# Altium PCB PCB2.PcbDoc
Units mil, origin at the board's own origin, x right, y up, seen from the top; angles counter-clockwise.
Board outline 3504.19 x 3504.19 mil, 2 copper layers (Top Layer, Bottom Layer); 6 components, 17 nets, 47 pads, 3 vias.
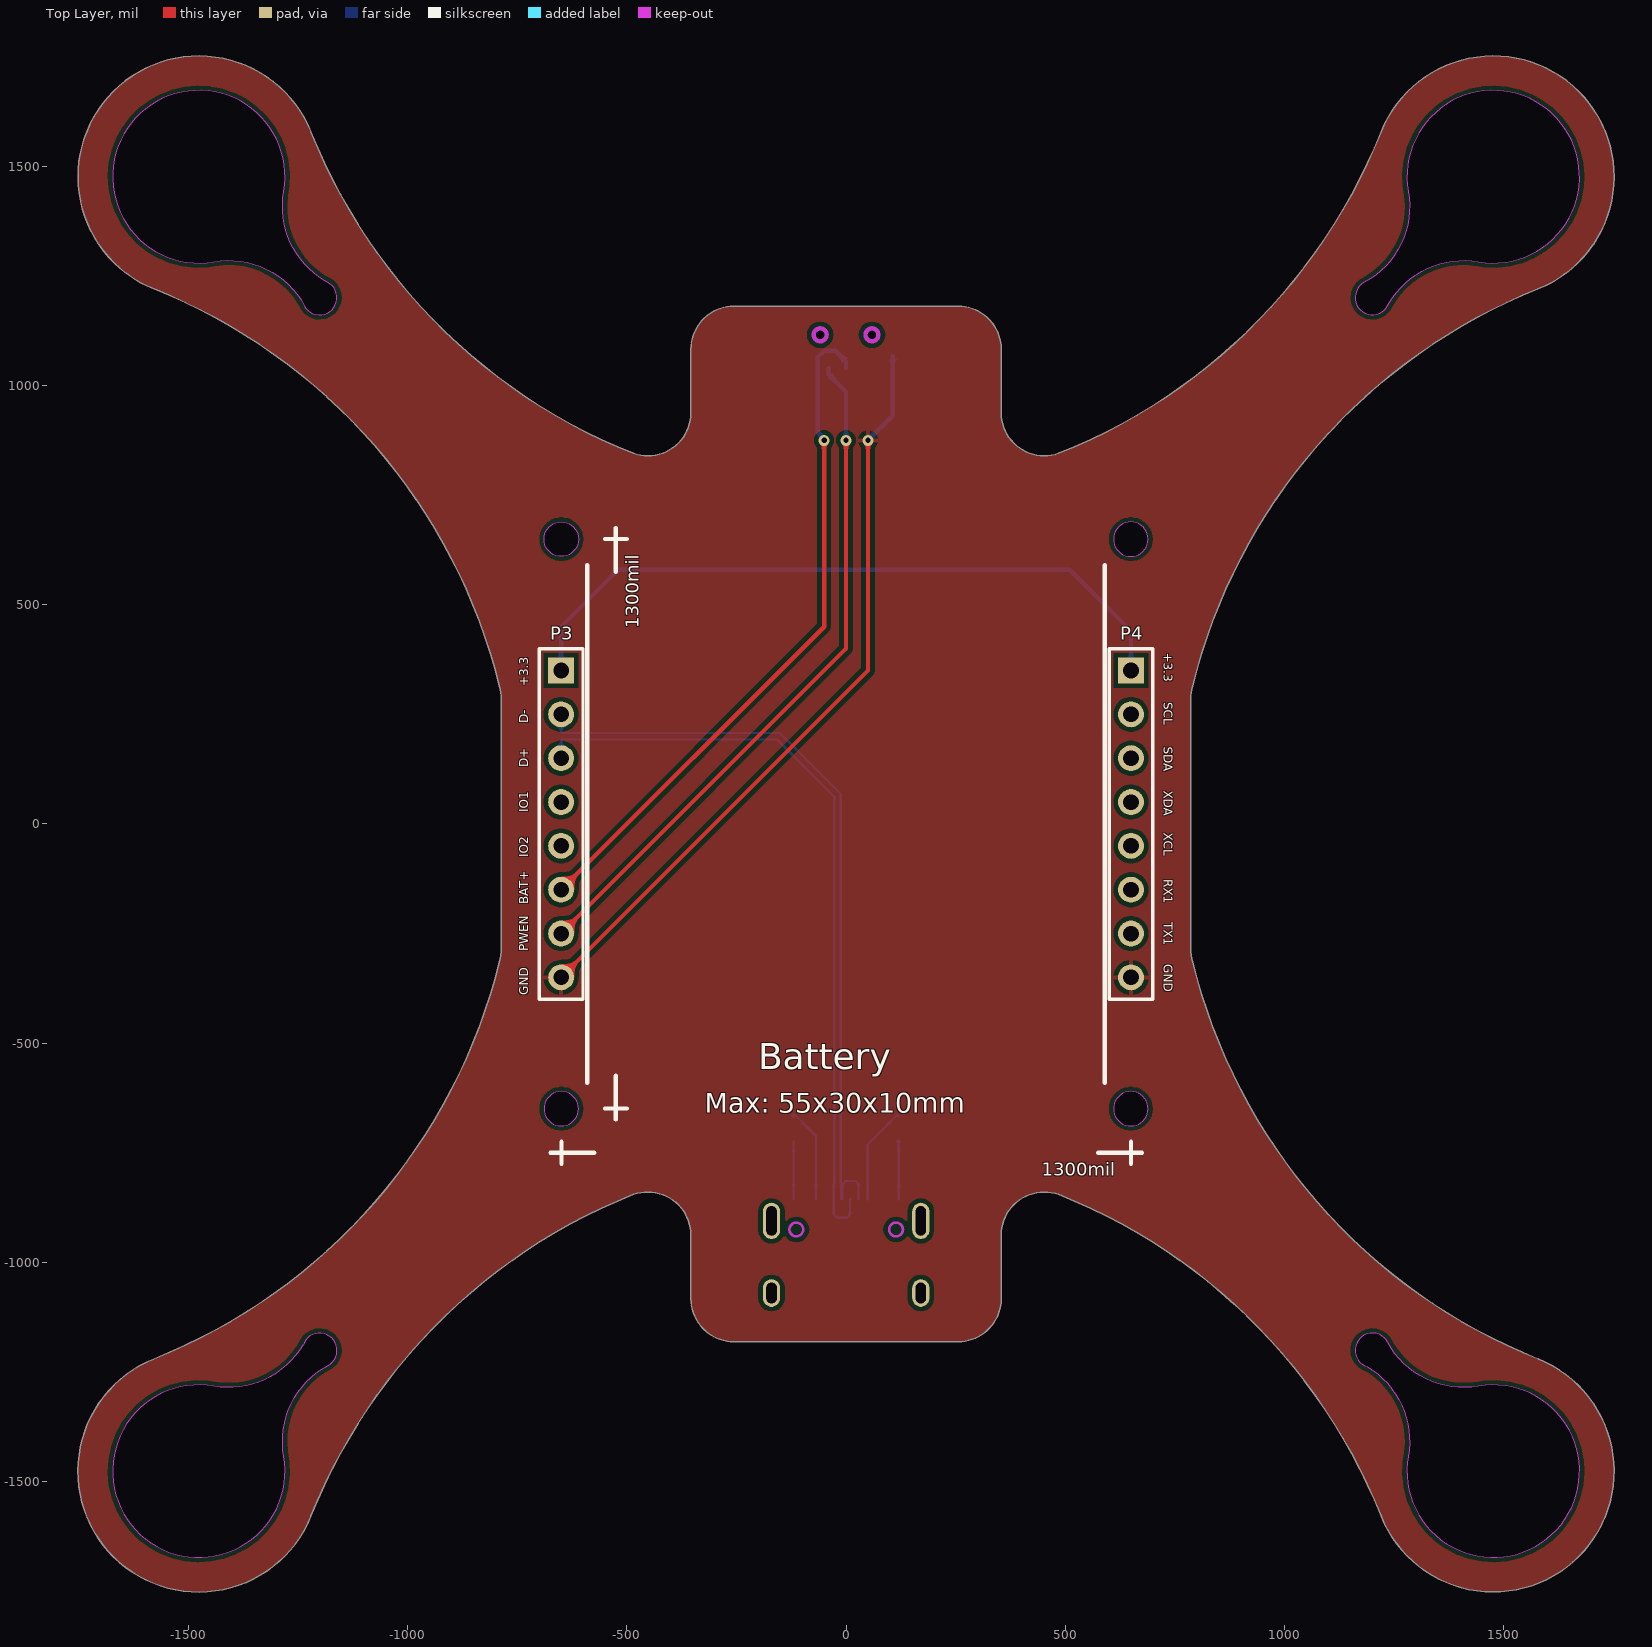
[diagram p0: Top Layer view]
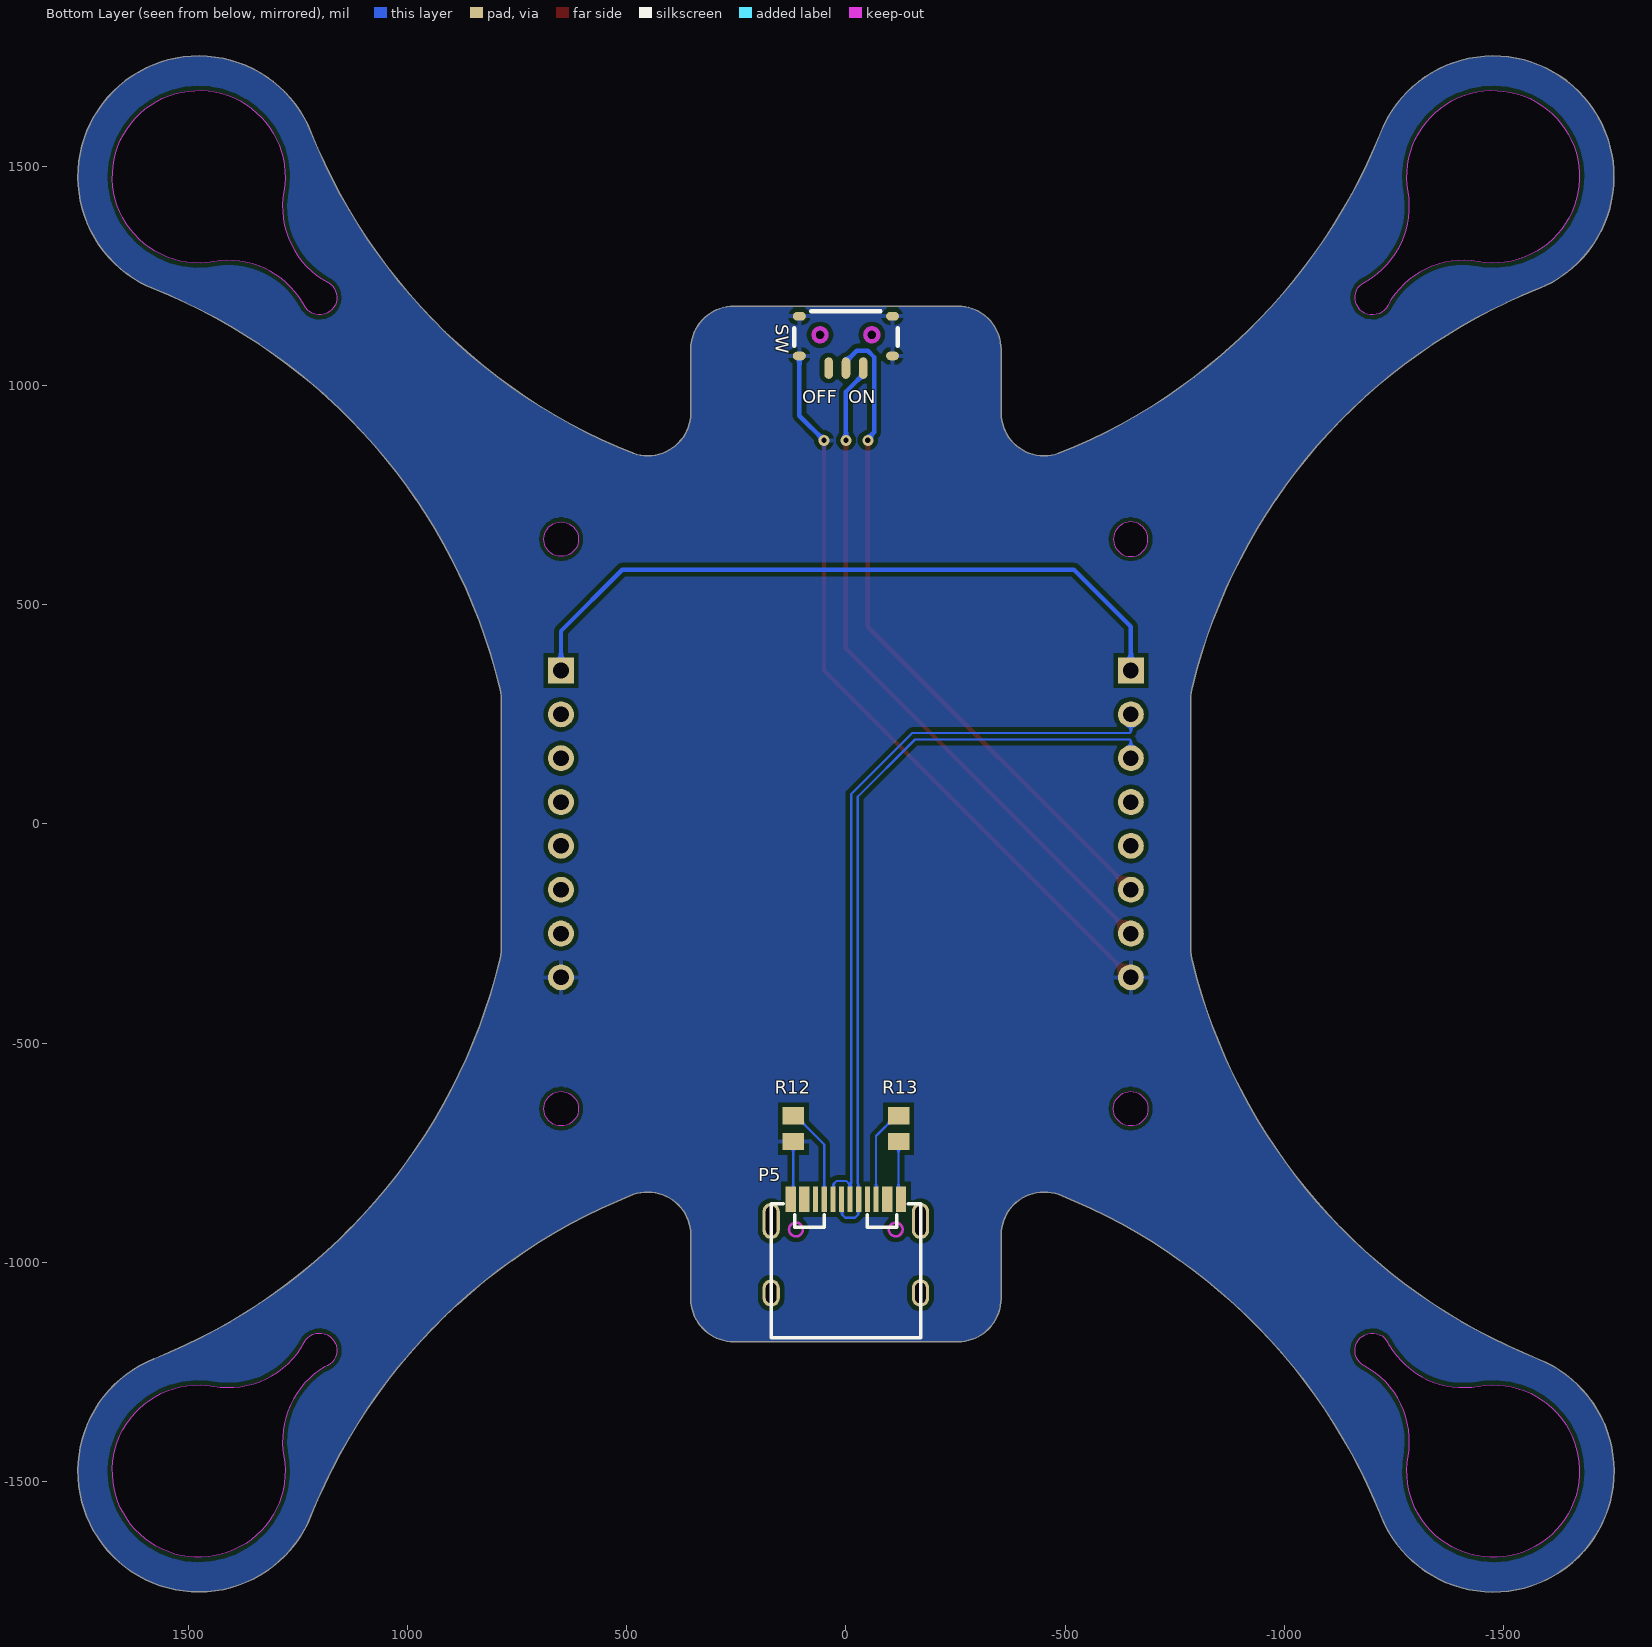
[diagram p1: Bottom Layer view, seen from below]

## Layer stack, top to bottom
Top Solder: solder mask 0.4, Solder Resist, Dk 3.5
Top Layer: signal copper 1.4
Dielectric 1: dielectric 12.6, FR-4, Dk 4.8
Bottom Layer: signal copper 1.4
Bottom Solder: solder mask 0.4, Solder Resist, Dk 3.5

## Board outline
-1578.93,-1220.58 ccw(c-1476.54,-1476.54) -1220.61,-1579.01 cw(c-0.01,-2066.92) -484.95,-845.14 -484.92,-845.22 cw(c-452.32,-938.09) -353.9,-938.09 -353.9,-1082.68 ccw(c-255.47,-1082.68) -255.47,-1181.1 255.47,-1181.1 ccw(c255.47,-1082.68) 353.9,-1082.68 353.9,-938.09 cw(c452.32,-938.09) 484.92,-845.22 484.95,-845.14 cw(c0,-2066.93) 1220.61,-1579.02 ccw(c1476.38,-1476.38) 1578.53,-1220.42 1578.93,-1220.58 cw(c2066.93,0) 790.67,-314.83 790.94,-314.74 cw(c884.53,-284.26) 786.1,-284.26 786.1,284.26 cw(c884.53,284.26) 790.94,314.74 790.67,314.83 cw(c2066.93,0) 1578.93,1220.58 1578.53,1220.42 ccw(c1476.38,1476.38) 1220.61,1579.01 cw(c0.01,2066.92) 484.95,845.14 484.92,845.22 cw(c452.32,938.09) 353.9,938.09 353.9,1082.68 ccw(c255.47,1082.68) 255.47,1181.1 -255.47,1181.1 ccw(c-255.47,1082.68) -353.9,1082.68 -353.9,938.09 cw(c-452.32,938.09) -484.92,845.22 -484.95,845.14 cw(c0,2066.93) -1220.61,1579.02 ccw(c-1476.38,1476.38) -1578.53,1220.42 -1578.93,1220.58 cw(c-2066.93,0) -790.67,314.83 -790.94,314.74 cw(c-884.53,284.26) -786.1,284.26 -786.1,-284.26 cw(c-884.52,-284.26) -790.94,-314.74 -790.67,-314.83 cw(c-2066.93,0)
cut-out: -688.98,-649.61 ccw(c-649.61,-649.61) -649.61,-688.98 ccw(c-649.61,-649.61) -610.24,-649.61 ccw(c-649.61,-649.61) -649.61,-610.24 ccw(c-649.61,-649.61)
cut-out: 610.24,-649.61 ccw(c649.61,-649.61) 649.61,-688.98 ccw(c649.61,-649.61) 688.98,-649.61 ccw(c649.61,-649.61) 649.61,-610.24 ccw(c649.61,-649.61)
cut-out: 610.24,649.61 ccw(c649.61,649.61) 649.61,610.24 ccw(c649.61,649.61) 688.98,649.61 ccw(c649.61,649.61) 649.61,688.98 ccw(c649.61,649.61)
cut-out: -649.61,610.24 cw(c-649.61,649.61) -688.98,649.61 cw(c-649.61,649.61) -649.61,688.98 cw(c-649.61,649.61) -610.24,649.61 cw(c-649.61,649.61)
cut-out: -1442.37,1282.49 cw(c-1408.59,1088.66) -1235.51,1182.23 -1235.68,1182.14 ccw(c-1200.79,1200.79) -1189.3,1238.64 -1188.92,1239.3 cw(c-1088.55,1408.64) -1282.46,1442.51 ccw(c-1476.38,1476.38)
cut-out: 1182.23,1235.51 ccw(c1200.87,1200.72) 1238.64,1189.3 1239.3,1188.92 cw(c1408.64,1088.55) 1442.51,1282.46 ccw(c1476.38,1476.38) 1282.49,1442.37 1282.46,1442.51 cw(c1088.55,1408.64)
cut-out: 1189.3,-1238.64 cw(c1088.27,-1408.03) 1282.46,-1442.51 ccw(c1476.38,-1476.38) 1442.37,-1282.49 1442.51,-1282.46 cw(c1408.64,-1088.55) 1235.51,-1182.23 1235.68,-1182.14 ccw(c1200.79,-1200.79)
cut-out: -1442.51,-1282.46 ccw(c-1476.38,-1476.38) -1282.49,-1442.37 -1282.46,-1442.51 cw(c-1088.55,-1408.64) -1182.23,-1235.51 -1182.14,-1235.68 ccw(c-1200.79,-1200.79) -1238.64,-1189.3 -1239.3,-1188.92 cw(c-1408.64,-1088.55)

## Design rules (kind name [scope] priority, off if disabled: settings)
Clearance [All] p1: gap=10 ignorepadtopadclearanceinfootprint=FALSE
DiffPairsRouting DiffPair_DiffPairsRouting [InDifferentialPair ('USB')] p1: maxlimit=10 minlimit=10 mostfreqgap=10 toplayer_minwidth=5 toplayer_maxwidth=15 toplayer_prefwidth=5 bottomlayer_minwidth=5 bottomlayer_maxwidth=15 bottomlayer_prefwidth=5 maxuncoupledlength=500
DiffPairsRouting [All] p2: maxlimit=10 minlimit=10 mostfreqgap=10 toplayer_minwidth=15 toplayer_maxwidth=15 toplayer_prefwidth=15 bottomlayer_minwidth=15 bottomlayer_maxwidth=15 bottomlayer_prefwidth=15 maxuncoupledlength=500
MatchedLengths DiffPair_MatchedLengths [InDifferentialPair ('USB')] p1: tolerance=1000 checknetsindiffpair=FALSE checkdiffpairvsdiffpair=TRUE checkxsignals=TRUE checkothers=TRUE
PolygonConnect [All] p1: connectstyle=Relief reliefconductorwidth=10 reliefentries=4 polygonreliefangle="90 Angle" airgapwidth=10
RoutingVias [All] p1: holewidth=28 width=50 viastyle="Through Hole" minholewidth=28 minwidth=50 maxholewidth=28 maxwidth=50
SolderMaskExpansion [All] p1: expansion=4 istentingtop=FALSE
Width [All] p1: maxlimit=10 minlimit=5 preferedwidth=5 minimp=50.000000 maximp=50.000000 favimp=50.000000
29 further rules are at their usual default settings.

## Classes and differential pairs
differential pair USB: +USB_P -USB_N

## Components (designator, comment, footprint, x,y, rotation, side; value= is the part's Value field where it differs from the comment)
P3 "Header 8" HDR1X8 -650,350 r270 top locked
P4 "Header 8" HDR1X8 650,350 r270 top locked
P5 "TYPE-C_16PIN" USB-TYPE-C_16PIN 49.49,-856.22 r180 bottom locked
R12 "5.1K" RESC2013X60X40LL20T25_A 120,-695 r90 bottom
R13 "5.1K" RESC2013X60X40LL20T25_A -120,-695 r270 bottom
SW "MSKT-12C00" MSKT-12C00 118.11,1169.92 r180 bottom locked

## Footprints (in the part's own frame and the unit in brackets; to place one, negate y for a bottom-side part, rotate by r counter-clockwise, add the part's x,y. Pads: shape width x height; smd on the part's side, far side on the other; paste and mask are expansions set on the pad)
HDR1X8 [mm] "Connector; Header; 8 Position"
  rect 1.5x1.5 hole 0.9: 1(0,0)
  round 1.5 hole 0.9: 2(2.54,0) 3(5.08,0) 4(7.62,0) 5(10.16,0) 6(12.7,0) 7(15.24,0) 8(17.78,0)
  silkscreen extent -1.27,-1.27 19.05,1.27
MSKT-12C00 [mm]
  oval 0.5x1.25 smd: 1(2,-3.3) 2(4,-3.3) C(3,-3.3)
  oval 0.75x0.5 smd: 3(0.3,-0.3) 4(5.7,-0.3) 5(5.7,-2.6) 6(0.3,-2.6)
  Keep-Out Layer board cut-out: 4.125,-1.375 4.154,-1.519 4.235,-1.64 4.356,-1.721 4.5,-1.75 4.5,-1.75 4.644,-1.721 4.765,-1.64 4.846,-1.519 4.875,-1.375 4.875,-1.375 4.846,-1.231 4.765,-1.11 4.644,-1.029 4.5,-1 4.5,-1 4.356,-1.029 4.235,-1.11 4.154,-1.231 4.125,-1.375
  Keep-Out Layer board cut-out: 1.125,-1.375 1.154,-1.519 1.235,-1.64 1.356,-1.721 1.5,-1.75 1.5,-1.75 1.644,-1.721 1.765,-1.64 1.846,-1.519 1.875,-1.375 1.875,-1.375 1.846,-1.231 1.765,-1.11 1.644,-1.029 1.5,-1 1.5,-1 1.356,-1.029 1.235,-1.11 1.154,-1.231 1.125,-1.375
  Keep-Out Layer circle w0.254: c4.5,-1.375 r0.375
  Keep-Out Layer circle w0.254: c1.5,-1.375 r0.375
  silkscreen extent 0,-2 6,0
RESC2013X60X40LL20T25_A [mm] "Chip Resistor, 2-Leads, Body 2.20x1.35mm, IPC High Density"
  rect 1x1.25 smd: 1(-0.75,0) 2(0.75,0)
  body extent -1.1,-0.67 1.1,0.67, height 0.6
USB-TYPE-C_16PIN [mm] "TYPE-C_16PIN"
  oval 1x1.6 hole 0.6 slot 1.2 at 90 deg: 0(-3.075,-5.43) 0(5.575,-5.43)
  oval 1x2.1 hole 0.6 slot 1.7 at 90 deg: 0(-3.075,-1.25) 0(5.575,-1.25)
  rect 0.3x1.5 smd: A1(-2.1,0) A4(-1.3,0) A5(0,0) A6(1,0) A7(1.5,0) A8(2.5,0) A9(3.8,0) A12(4.6,0) B1(4.3,0) B4(3.5,0) B5(3,0) B6(2,0) B7(0.5,0) B8(-0.5,0) B9(-1,0) B12(-1.8,0)
  Keep-Out Layer circle w0.152: c4.14,-1.75 r0.4
  Keep-Out Layer circle w0.152: c-1.64,-1.75 r0.4
  silkscreen extent -3.08,-8.03 5.6,-0.25

## Part data
P3 P4: "Header, 8-Pin", LatestRevisionDate=17-Jul-2002, LatestRevisionNote="Re-released for DXP Platform.", Publisher="Altium Limited"
R12 R13: library part CMP-2001-00582-2, "Metal Film Chip Resistor, High Reliability Type, 0.125 W, +/- 0.1%, -55 to 155 degC, 0805 (2012 Metric), RoHS, Tape and Reel", Case Code - in=0805, Case Code - mm=2012, Manufacturer=Panasonic, Operating Temperature Range=-55Cto+155C, Package / Case=0805(2012metric), Package Description="2-Pin Surface Mount Device, Body 2 x 1.25 mm", Power Rating=125mW(1/8W), Resistance=10kOhms, Temperature Coefficient=25PPM/C, Tolerance=0.1%, Voltage Rating=100V, Brand=Panasonic, Datasheet URL=https://industrial.panasonic.com/cdbs/www-data/pdf/RDM0000/AOA0000C307.pdf, Datasheet Version=02/2016, Factory Pack Quantity=5000, Height=0.5mm, Length=2mm, Manufacturer URL=http://www.panasonic.com/, Mounting Technology=SurfaceMount, Package Reference=0805, Packaging=Reel, Product=ThinFilmResistorsSMD, Product Category=ThinFilmResistors-SMD, RoHS=Details, Series=ERA-6A, Termination Style=SMD/SMT, Type=MetalFilmChipResistors, Width=1.25mm
P5: LatestRevisionDate=17-Jul-2002, LatestRevisionNote="Re-released for DXP Platform.", Publisher="Altium Limited"

## Via types
v1: diameter 25, hole 12, Top Layer to Bottom Layer, 3 vias

## Nets (pads, with @x,y where several pads share a name; then routed paths per layer and width w, separated by ;. In a path a pad name is that pad's centre, name@x,y a point inside that pad or via, vN(x,y) a via of type N, cw(c..) or ccw(c..) an arc to the next point about the centre after c; other vN are vias at no path point)
+3.3: P3.1 P4.1 | length 1601.8
  Bottom Layer w10: P3.1 -650,450 -520,580 510,580 650,440 P4.1
BAT+: P3.6 SW.C | length 1564.8
  Top Layer w10: P3.6 -50,450 v1(-50,875)
  Bottom Layer w10: v1(-50,875) -50,879.06 -64.21,893.27 -64.21,1065.05 -49.66,1079.61 -24.84,1079.61 0,1054.76 SW.C
GND: P3.8 P4.8 P5.A1 P5.B12 R12.1 SW.3 SW.4 SW.5 SW.6 | length 1864.2
  Top Layer w10: P3.8 50,350 v1(50,875)
  Bottom Layer w5: R12.1 120.35,-724.88 P5.B12
  Bottom Layer w10: v1(50,875) 106.3,931.3 SW.6 ; R12.1@118.9,-725.63 R12.1
IO1: P3.4
IO2: P3.5
NetP5_A5: P5.A5 R12.2 | length 222.8
  Bottom Layer w5: P5.A5 49.49,-731.06 115.08,-665.47 R12.2
NetP5_A12: P5.A12 P5.B1 R13.2 | length 131.8
  Bottom Layer w5: R13.2 -119.8,-724.72 P5.B1
NetP5_B5: P5.B5 R13.1 | length 216
  Bottom Layer w5: R13.1 -115.08,-665.47 -68.62,-711.93 P5.B5
  Bottom Layer w10: R13.1@-120.79,-664.68 R13.1
PW_EN: P3.7 SW.2 | length 1575.5
  Top Layer w10: P3.7 0,400 v1(0,875)
  Bottom Layer w10: SW.2 -39.37,1025.24 0,985.87 v1(0,875)
RXD1: P4.6
RXD2: P4.4
SCL: P4.2
SDA: P4.3
TXD1: P4.7
TXD2: P4.5
USB_N: P3.2 P5.A7 P5.B7 | length 1775.3
  Bottom Layer w5: P3.2 -650,210.43 -647.07,207.5 -151.29,207.5 -11.91,68.12 -11.91,-820.45 -10.85,-821.52 -10.85,-854.94 P5.A7 -8.29,-854.94 -8.29,-821.52 -0.97,-814.19 21.2,-814.19 28.52,-821.52 28.52,-854.94 P5.B7
USB_P: P3.3 P5.A6 P5.B6 | length 1750.4
  Bottom Layer w5: P3.3 -650,189.57 -647.07,192.5 -157.5,192.5 -26.91,61.91 -26.91,-820.45 -27.97,-821.52 -27.97,-854.94 P5.B6 -27.97,-857.5 -27.97,-890.93 -20.65,-898.25 1.52,-898.25 8.84,-890.93 8.84,-857.5 P5.A6
pads on no net: P5.0 P5.A4 P5.A8 P5.A9 P5.B4 P5.B8 P5.B9 SW.1

## Polygon pours and split planes (outlines as drawn)
GND on Top Layer "GND_L01_P002" (solid, remove dead copper, pour order 2): -1578.93,-1220.58 ccw(c-1476.54,-1476.54) -1220.61,-1579.01 cw(c-0.01,-2066.92) -484.95,-845.14 -484.92,-845.22 cw(c-452.32,-938.09) -353.9,-938.09 -353.9,-1082.68 ccw(c-255.47,-1082.68) -255.47,-1181.1 255.47,-1181.1 ccw(c255.47,-1082.68) 353.9,-1082.68 353.9,-938.09 cw(c452.32,-938.09) 484.92,-845.22 484.95,-845.14 cw(c0,-2066.93) 1220.61,-1579.02 ccw(c1476.38,-1476.38) 1578.53,-1220.42 1578.93,-1220.58 cw(c2066.93,0) 790.67,-314.83 790.94,-314.74 cw(c884.53,-284.26) 786.1,-284.26 786.1,284.26 cw(c884.53,284.26) 790.94,314.74 790.67,314.83 cw(c2066.93,0) 1578.93,1220.58 1578.53,1220.42 ccw(c1476.38,1476.38) 1220.61,1579.01 cw(c0.01,2066.92) 484.95,845.14 484.92,845.22 cw(c452.32,938.09) 353.9,938.09 353.9,1082.68 ccw(c255.47,1082.68) 255.47,1181.1 -255.47,1181.1 ccw(c-255.47,1082.68) -353.9,1082.68 -353.9,938.09 cw(c-452.32,938.09) -484.92,845.22 -484.95,845.14 cw(c0,2066.93) -1220.61,1579.02 ccw(c-1476.38,1476.38) -1578.53,1220.42 -1578.93,1220.58 cw(c-2066.93,0) -790.67,314.83 -790.94,314.74 cw(c-884.53,284.26) -786.1,284.26 -786.1,-284.26 cw(c-884.52,-284.26) -790.94,-314.74 -790.67,-314.83 cw(c-2066.93,0)
GND on Bottom Layer "GND_L02_P001" (solid, remove dead copper, pour order 1): -1578.93,-1220.58 ccw(c-1476.54,-1476.54) -1220.61,-1579.01 cw(c-0.01,-2066.92) -484.95,-845.14 -484.92,-845.22 cw(c-452.32,-938.09) -353.9,-938.09 -353.9,-1082.68 ccw(c-255.47,-1082.68) -255.47,-1181.1 255.47,-1181.1 ccw(c255.47,-1082.68) 353.9,-1082.68 353.9,-938.09 cw(c452.32,-938.09) 484.92,-845.22 484.95,-845.14 cw(c0,-2066.93) 1220.61,-1579.02 ccw(c1476.38,-1476.38) 1578.53,-1220.42 1578.93,-1220.58 cw(c2066.93,0) 790.67,-314.83 790.94,-314.74 cw(c884.53,-284.26) 786.1,-284.26 786.1,284.26 cw(c884.53,284.26) 790.94,314.74 790.67,314.83 cw(c2066.93,0) 1578.93,1220.58 1578.53,1220.42 ccw(c1476.38,1476.38) 1220.61,1579.01 cw(c0.01,2066.92) 484.95,845.14 484.92,845.22 cw(c452.32,938.09) 353.9,938.09 353.9,1082.68 ccw(c255.47,1082.68) 255.47,1181.1 -255.47,1181.1 ccw(c-255.47,1082.68) -353.9,1082.68 -353.9,938.09 cw(c-452.32,938.09) -484.92,845.22 -484.95,845.14 cw(c0,2066.93) -1220.61,1579.02 ccw(c-1476.38,1476.38) -1578.53,1220.42 -1578.93,1220.58 cw(c-2066.93,0) -790.67,314.83 -790.94,314.74 cw(c-884.53,284.26) -786.1,284.26 -786.1,-284.26 cw(c-884.52,-284.26) -790.94,-314.74 -790.67,-314.83 cw(c-2066.93,0)

## Silkscreen, mask and mechanical layers (free items; w line width, h text height)
Top Overlay:
  lines w10: -674.21,-750 -574.21,-750 ; -649.21,-775 -649.21,-725 ; -590.55,-590.55 -590.55,590.55 ; -550,-649.21 -500,-649.21 ; -550,650 -500,650 ; -525,-674.21 -525,-574.21 ; -525,575 -525,675 ; 575,-750 675,-750 ; 590.55,-590.55 590.55,590.55 ; 650,-775 650,-725
  text "1300mil" at -473,446.34 h30 r90
  text "+3.3" at 724.5,390.08 h20 r270
  text "+3.3" at -724.72,314.45 h20 r90
  text "SCL" at 724.5,277.87 h20 r270
  text "D-" at -724.72,229.8 h20 r90
  text "SDA" at 724.5,176.5 h20 r270
  text "D+" at -724.72,129.41 h20 r90
  text "XDA" at 724.5,76.1 h20 r270
  text "IO1" at -724.72,27.05 h20 r90
  text "XCL" at 724.5,-20.35 h20 r270
  text "IO2" at -724.72,-76.3 h20 r90
  text "RX1" at 724.5,-126.65 h20 r270
  text "BAT+" at -724.72,-183.58 h20 r90
  text "TX1" at 724.5,-224.09 h20 r270
  text "PWEN" at -724.72,-290.87 h20 r90
  text "GND" at 724.5,-320.55 h20 r270
  text "GND" at -724.72,-391.26 h20 r90
  text "Battery" at -199.94,-560.01 h60
  text "Max: 55x30x10mm" at -322.4,-659.29 h45
  text "1300mil" at 446.34,-802 h30
Bottom Overlay:
  text "OFF  ON" at 100,960 h30
Mechanical 1:
  circle w10: c-649.61,-649.61 r39.37
  circle w10: c649.61,-649.61 r39.37
  circle w10: c649.61,649.61 r39.37
  circle w10: c-649.61,649.61 r39.37
  lines w10: -1578.93,-1220.58 ccw(c-2066.93,0) -790.67,-314.83 ; -1578.93,1220.58 cw(c-2066.93,0) -790.67,314.83 ; -1578.53,-1220.42 ccw(c-1476.38,-1476.38) -1220.61,-1579.01 cw(c0,-2066.93) -484.95,-845.14 ; -1578.53,1220.42 cw(c-1476.38,1476.38) -1220.61,1579.01 ccw(c0,2066.93) -484.95,845.14 ; -1442.51,1282.46 cw(c-1408.64,1088.55) -1235.51,1182.23 ; -1442.37,1282.49 cw(c-1476.38,1476.38) -1282.46,1442.51 ccw(c-1088.55,1408.64) -1188.92,1239.3 ; -1282.49,-1442.37 cw(c-1476.38,-1476.38) -1442.51,-1282.46 ccw(c-1408.64,-1088.55) -1239.3,-1188.92 ; -1282.46,-1442.51 cw(c-1088.55,-1408.64) -1182.23,-1235.51 ; -1238.64,-1189.3 cw(c-1200.79,-1200.79) -1182.14,-1235.68 ; -1235.68,1182.14 ccw(c-1200.79,1200.79) -1189.3,1238.64 ; -790.94,-314.74 ccw(c-884.53,-284.26) -786.1,-284.26 -786.1,284.26 ccw(c-884.53,284.26) -790.94,314.74 ; -484.92,-845.22 cw(c-452.32,-938.09) -353.9,-938.09 -353.9,-1082.68 ccw(c-255.47,-1082.68) -255.47,-1181.1 255.47,-1181.1 ccw(c255.47,-1082.68) 353.9,-1082.68 353.9,-938.09 cw(c452.32,-938.09) 484.92,-845.22 ; -484.92,845.22 ccw(c-452.32,938.09) -353.9,938.09 -353.9,1082.68 cw(c-255.47,1082.68) -255.47,1181.1 255.47,1181.1 cw(c255.47,1082.68) 353.9,1082.68 353.9,938.09 ccw(c452.32,938.09) 484.92,845.22 ; 484.95,-845.14 cw(c0,-2066.93) 1220.61,-1579.02 ccw(c1476.38,-1476.38) 1578.53,-1220.42 ; 484.95,845.14 ccw(c0,2066.93) 1220.61,1579.02 cw(c1476.38,1476.38) 1578.53,1220.42 ; 790.67,-314.83 ccw(c2066.93,0) 1578.93,-1220.58 ; 790.67,314.83 cw(c2066.93,0) 1578.93,1220.58 ; 790.94,-314.74 cw(c884.53,-284.26) 786.1,-284.26 786.1,284.26 cw(c884.53,284.26) 790.94,314.74 ; 1182.14,1235.68 ccw(c1200.79,1200.79) 1238.64,1189.3 ; 1182.23,1235.51 ccw(c1088.55,1408.64) 1282.46,1442.51 ; 1188.92,-1239.3 cw(c1088.55,-1408.64) 1282.46,-1442.51 ccw(c1476.38,-1476.38) 1442.37,-1282.49 ; 1189.3,-1238.64 cw(c1200.79,-1200.79) 1235.68,-1182.14 ; 1235.51,-1182.23 ccw(c1408.64,-1088.55) 1442.51,-1282.46 ; 1239.3,1188.92 cw(c1408.64,1088.55) 1442.51,1282.46 ccw(c1476.38,1476.38) 1282.49,1442.37